# Altium PCB TM7705.PcbDoc
Units mm, origin at the board's own origin, x right, y up, seen from the top; angles counter-clockwise.
Board outline 80.01 x 33.4 mm, 2 copper layers (Top Layer, Bottom Layer); 36 components, 26 nets, 145 pads, 0 vias.
Unrouted connection lines stored in the file: 4.
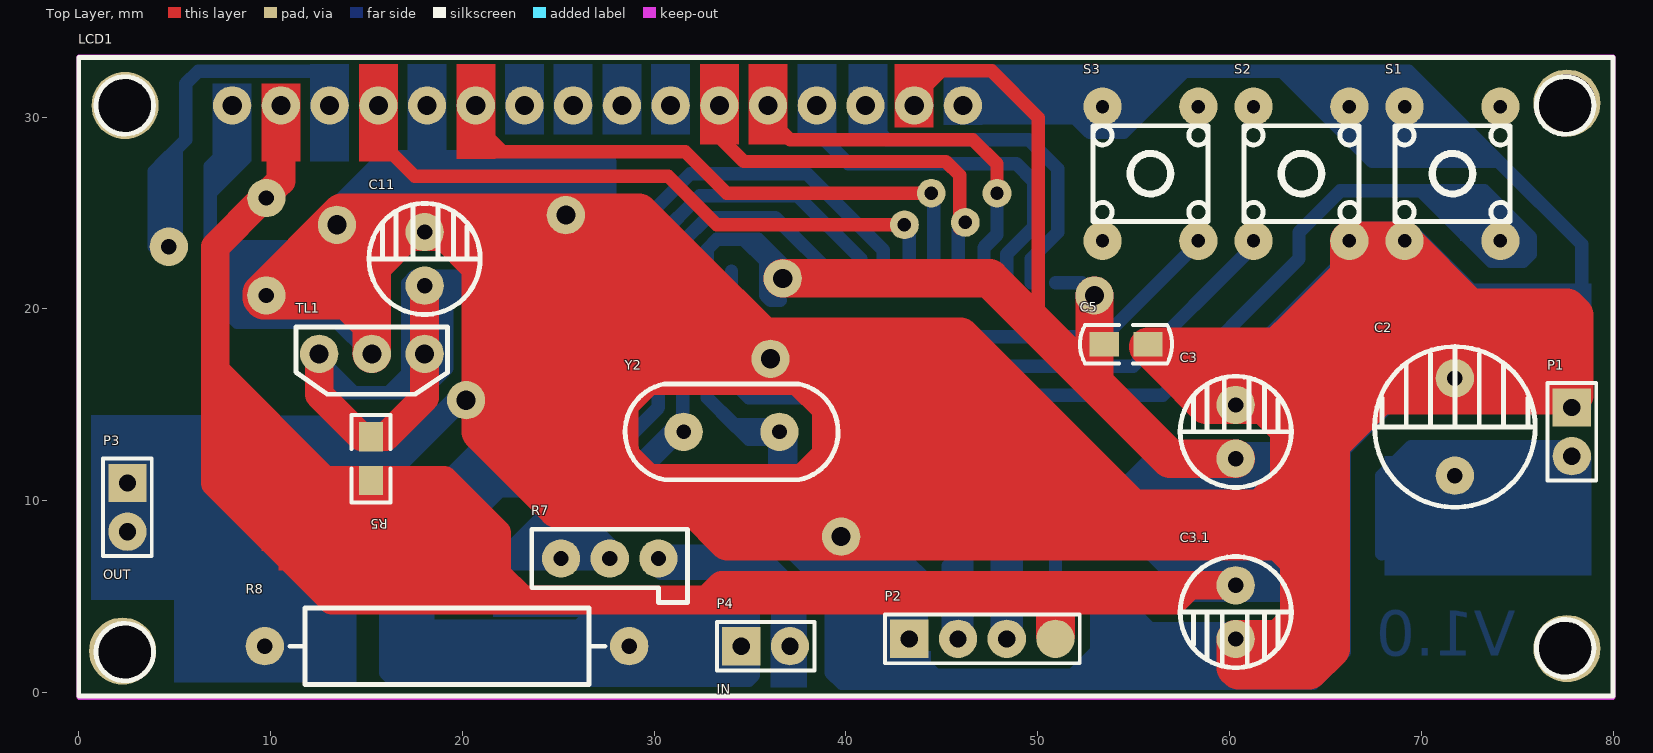
[diagram p0: Top Layer view]
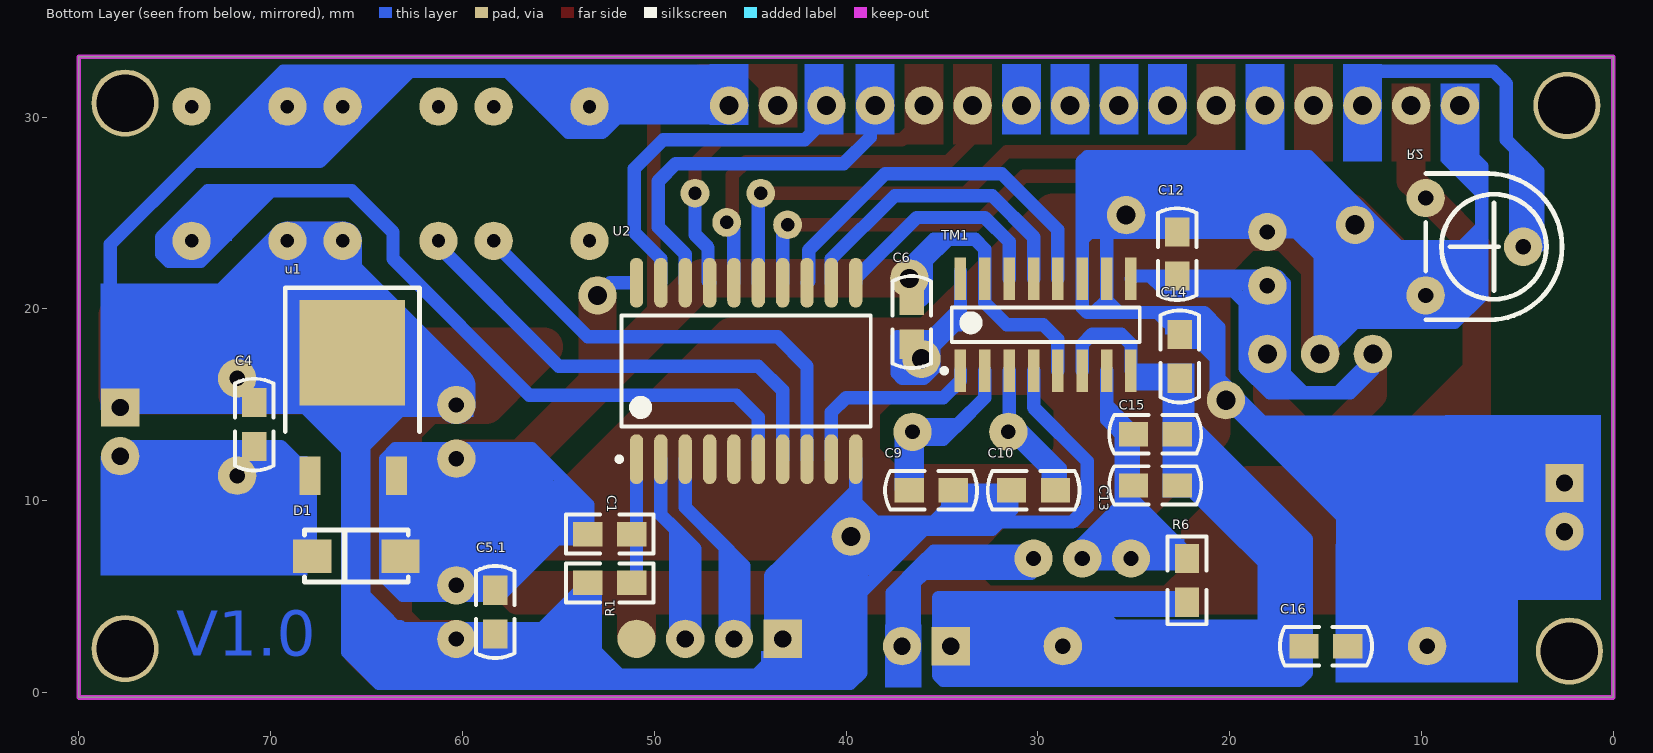
[diagram p1: Bottom Layer view, seen from below]

## Layer stack, top to bottom
Top Layer: signal copper 0.0356
Dielectric: dielectric 0.32, FR-4, Dk 4.8
Bottom Layer: signal copper 0.0356

## Board outline
0,-0.254 80.01,-0.254 80.01,33.147 0,33.147

## Design rules (kind name [scope] priority, off if disabled: settings)
Clearance [All] p1: gap=0.254
PolygonConnect [All] p1: connectstyle=Relief reliefconductorwidth=0.254 reliefentries=4 polygonreliefangle="90 Angle" airgapwidth=0.254
RoutingVias [All] p1: holewidth=0.711 width=1.27 viastyle="Through Hole" minholewidth=0.711 minwidth=1.27 maxholewidth=0.711 maxwidth=1.27
SolderMaskExpansion [All] p1: expansion=0.102
Width [All] p1: maxlimit=3 minlimit=0.4 preferedwidth=0.5 toplayer_minwidth=0.5 minimp=50.000000 maximp=50.000000 favimp=50.000000
28 further rules are at their usual default settings.

## Components (designator, comment, footprint, x,y, rotation, side; value= is the part's Value field where it differs from the comment)
C1 "10uF" 0805 53.467,8.255 r180 bottom
C2 "100uF" DR3 71.755,11.303 r90 top
C3 "100uF" DR 60.325,12.192 r90 top
C3.1 "100uF" DR 60.325,5.588 r270 top
C4 "104" 0805C 70.866,15.113 r270 bottom
C5 "104" 0805C 55.753,18.161 r180 top
C5.1 "104" 0805C 58.293,3.048 r90 bottom
C6 "226" 0805C 36.576,18.161 r90 bottom
C9 "30p" 0805C 34.417,10.541 r0 bottom
C10 "30p" 0805C 31.369,10.541 r180 bottom
C11 "47U" DR 18.034,21.209 r90 top
C12 "104" 0805C 22.733,24.003 r270 bottom
C13 "226" 0805C 22.733,10.795 r0 bottom
C14 "103" 0805C 22.606,18.669 r270 bottom
C15 "103" 0805C 22.733,13.462 r0 bottom
C16 "226" 0805C 16.129,2.413 r180 bottom
D1 "Diode" DO-214AC 65.532,7.112 r0 bottom
LCD1 "LCD1602" LCD1602 8.001,30.607 r0 top
P1 "Header 2" HDR1X2 77.851,14.859 r270 top
P2 "comm" HDR1X4 43.307,2.794 r0 top
P3 "OUT" HDR1X2 2.54,10.922 r270 top
P4 "IN" HDR1X2 34.544,2.413 r0 top
R1 "10K" 0805R 51.181,5.715 r0 bottom
R2 "10k" DWQ 9.779,20.701 r180 bottom
R5 "1K" 0805R 15.24,13.335 r270 top
R6 "5K" 0805R 22.225,4.699 r90 bottom
R7 "100k" DWQ1 30.226,6.985 r180 top
R8 "0.01" DZ-1W 28.702,2.413 r180 top
S1 "SW-PB" SW 71.628,27.051 r0 top
S2 "SW-PB" SW 63.754,27.051 r180 top
S3 "SW-PB" SW 55.88,27.051 r0 top
TL1 "TL431" TL431 18.034,17.653 r180 top
TM1 "TM7705" SOIC-16 29.591,19.177 r90 bottom
u1 "7805" DPAK 67.945,11.303 r180 bottom
U2 "STC12C2052" SOIC-20 45.212,16.764 r90 bottom
Y2 "4.9152M" JZ 34.036,13.589 r0 top

## Footprints (in the part's own frame and the unit in brackets; to place one, negate y for a bottom-side part, rotate by r counter-clockwise, add the part's x,y. Pads: shape width x height; smd on the part's side, far side on the other; paste and mask are expansions set on the pad)
0805 [mil]
  rect 60x50 smd: 1(0,0) 2(90,0)
  silkscreen extent -45,-40 135,40
0805C [mil]
  rect 60x50 smd: 1(0,0) 2(90,0)
  silkscreen extent -49,-39 140,39
0805R [mil]
  rect 60x50 smd: 1(0,0) 2(90,0)
  silkscreen extent -45,-40 135,40
DO-214AC [mm]
  rect 2x1.75 smd: 1(-2.3,0) 2(2.3,0)
  silkscreen extent -2.7,-1.35 2.7,1.35, body extent -2.74,-1.52 2.74,1.27, height 2.3
DPAK [mm]
  rect 1.1x2 smd: 1(0,0) 3(4.5,0)
  rect 5.5x5.5 smd: 2(2.2,6.4)
  silkscreen extent -1.3,2.3 5.7,9.8
DR [mm]
  round 2 hole 0.8: 1(0,0) 2(2.8,0)
  silkscreen extent -1.5,-2.9 4.3,2.9
DR3 [mm]
  round 2 hole 0.8: 1(0,0) 2(5.08,0)
  silkscreen extent -1.65,-4.19 6.73,4.19
DWQ [mm]
  round 2 hole 0.8: 1(0,0) 2(0,5.08) 3(5.08,2.54)
  silkscreen extent 0,-1.27 7.11,6.35
DWQ1 [mm]
  round 2 hole 0.8: 1(0,0) 2(5.08,0) 3(2.54,0)
  silkscreen extent -1.52,-1.52 6.6,2.29
DZ-1W [mm]
  round 2 hole 0.8: 1(0,0) 2(19,0)
  silkscreen extent 1.27,-2 17.7,2
HDR1X2 [mm] "Connector; Header; 2 Position"
  rect 2x2 hole 0.9: 1(0,0)
  round 2 hole 0.9: 2(2.54,0)
  silkscreen extent -1.27,-1.27 3.81,1.27
HDR1X4 [mm] "Connector; Header; 4 Position"
  rect 2x2 hole 0.9: 1(0,0)
  round 2 hole 0.9: 2(2.54,0) 3(5.08,0)
  round 2 all layers, no hole: 4(7.62,0)
  silkscreen extent -1.27,-1.27 8.89,1.27
JZ [mm]
  round 2 hole 0.762: 1(-2.5,0) 2(2.5,0)
  silkscreen extent -5.55,-2.5 5.56,2.5
LCD1602 [mm]
  round 2 hole 1: 1(0,0) 2(2.54,0) 3(5.08,0) 4(7.62,0) 5(10.16,0) 6(12.7,0) 7(15.24,0) 8(17.78,0) 9(20.32,0) 10(22.86,0) 11(25.4,0) 12(27.94,0) 13(30.48,0) 14(33.02,0) 15(35.56,0) 16(38.1,0)
  silkscreen extent -8,-30.8 72,2.5
SOIC-16 [mm]
  rect 2.2x0.6 smd: 1(-2.4,4.445) 2(-2.4,3.175) 3(-2.4,1.905) 4(-2.4,0.635) 5(-2.4,-0.635) 6(-2.4,-1.905) 7(-2.4,-3.175) 8(-2.4,-4.445) 9(2.4,-4.445) 10(2.4,-3.175) 11(2.4,-1.905) 12(2.4,-0.635) 13(2.4,0.635) 14(2.4,1.905) 15(2.4,3.175) 16(2.4,4.445)
  silkscreen extent -2.52,-4.9 0.9,5.42, body extent -3.1,-5 3,5, height 1.51
SOIC-20 [mm]
  oval 2.6x0.7 smd: 1(-4.6,5.715) 2(-4.6,4.445) 3(-4.6,3.175) 4(-4.6,1.905) 5(-4.6,0.635) 6(-4.6,-0.635) 7(-4.6,-1.905) 8(-4.6,-3.175) 9(-4.6,-4.445) 10(-4.6,-5.715) 11(4.6,-5.715) 12(4.6,-4.445) 13(4.6,-3.175) 14(4.6,-1.905) 15(4.6,-0.635) 16(4.6,0.635) 17(4.6,1.905) 18(4.6,3.175) 19(4.6,4.445) 20(4.6,5.715)
  silkscreen extent -4.72,-6.5 2.9,6.74, body extent -5.22,-6.47 5.33,6.53, height 2.56
SW [mm]
  round 2 hole 0.7: 1(-2.5,-3.5) 1(-2.5,3.5) 2(2.5,-3.5) 2(2.5,3.5)
  silkscreen extent -3,-2.5 3,2.5
TL431 [mm]
  round 2 hole 1: A(2.75,0) K(5.5,0) R(0,0)
  silkscreen extent -1.2,-1.4 6.7,2.1

## Part data
C1 C2 C3 C3.1 C11: library part "Cap Pol1", "Polarized Capacitor (Radial)"
C4 C5 C5.1 C6 C9 C10 C12 C13 C14 C15 C16: library part Cap, "Capacitor"
D1: "Default Diode"
P1: "Header, 2-Pin"
P2: library part "Header 4", "Header, 4-Pin"
P3 P4: library part "Header 2", "Header, 2-Pin"
R1 R5 R6 R8: library part Res2, "Resistor"
R2 R7: library part RPot, "Potentiometer"
S1 S2 S3: "Switch"
Y2: library part XTAL, "Crystal Oscillator"

## Free pads (board coordinates)
  round 3.5 hole 3: 2(2.413,30.607) 3(77.597,30.734) 4(77.597,2.286) 5(2.286,2.159)
  round 2 hole 1: 14(52.959,20.701) 15(36.703,21.59) 22(20.193,15.24) 23(39.751,8.128) 24(13.462,24.384) 25(25.4,24.892) 29(36.068,17.399)
  round 1.5 hole 0.7: 17(47.879,26.035) 18(46.228,24.511) 20(44.45,26.035) 21(43.053,24.384)

## Nets (pads, with @x,y where several pads share a name; then routed paths per layer and width w, separated by ;. In a path a pad name is that pad's centre, name@x,y a point inside that pad or via, vN(x,y) a via of type N, cw(c..) or ccw(c..) an arc to the next point about the centre after c; other vN are vias at no path point)
+5VCC: C1.1 C3.1 C3.1.1 C5.1.2 C5.2 C6.2 D1.1 LCD1.2 LCD1.15 P2.4 pad.14 pad.15 R2.2 R5.2 TM1.5 TM1.15 u1.3 U2.20 | length 308.4
  Top Layer w0.7: LCD1.15 43.561,30.988 44.989,32.416 ; 43.942,32.416 44.989,32.416 ; 50.8,18.161 50.038,18.923 50.038,29.972 47.594,32.416 44.989,32.416
  Top Layer w1.5: LCD1.2 10.541,26.67 9.525,25.654 7.112,23.241 7.112,16.764 ; 19.431,8.509 21.78,6.159 ; 21.082,6.985 17.018,11.049 ; C3.1.1 57.912,5.588 ; 7.112,13.97 11.303,9.779 16.51,9.779 ; 7.112,13.97 7.112,15.367 ; 7.112,13.97 7.112,10.922 13.208,4.826 21.463,4.826 ; 7.112,15.367 11.43,11.049 12.827,11.049 ; 7.112,15.367 7.112,16.764 ; 7.112,16.764 12.827,11.049 ; 12.827,11.049 R5.2 ; R5.2 16.51,9.779 ; R5.2 17.018,11.049 ; 16.51,9.779 21.463,4.826 ; 17.018,11.049 19.05,11.049 21.78,8.319 21.78,6.159 ; 21.463,4.826 23.114,4.826 ; 21.78,6.159 23.114,4.826 ; 23.114,4.826 32.766,4.826 ; 32.766,4.826 33.528,5.588 57.912,5.588 ; 32.766,4.826 57.15,4.826 57.912,5.588
  Top Layer w2: pad.15 47.498,21.59 52.959,16.129 ; pad.14 52.959,16.129 ; C3.1 56.896,12.192 52.959,16.129
  Bottom Layer w0.7: TM1.5 28.956,18.415 29.718,19.177 31.623,19.177 32.766,20.32 TM1.15 32.766,23.114 33.274,23.622 34.671,23.622 ; C6.2 36.068,20.447 35.814,20.701 35.814,22.479 34.671,23.622 ; pad.15 pad.15@36.703,21.844 ; U2.20 52.296,21.364 pad.14 ; C1.1@53.086,8.001 55.118,8.001 58.039,5.08 63.119,5.08 64.008,5.969 ; 57.277,11.938 57.277,11.684 57.658,11.303 u1.3@63.019,11.303 ; 57.531,7.112 59.817,7.112 u1.3@63.232,10.527 ; 58.42,6.096 62.216,6.096 D1.1 u1.3@63.232,10.527 ; 34.671,23.622 34.925,23.622 ; 34.925,23.622 pad.15@36.703,21.844 ; 34.925,23.622 35.433,23.622 36.703,22.352 pad.15@36.703,21.844 ; 61.622,12.7 63.5,12.7 64.008,12.192 64.008,5.969 ; 61.622,12.7 u1.3@63.019,11.303 ; 61.622,12.7 56.388,12.7 53.467,9.779 C1.1 55.626,8.255 57.912,5.969 64.008,5.969 ; u1.3@63.019,11.303 u1.3 63.445,10.74 u1.3@63.232,10.527 ; u1.3@63.019,11.303 63.232,11.09 u1.3@63.232,10.527
DIN: TM1.14 U2.11 | length 12
  Bottom Layer w0.7: TM1.14 31.496,23.495 32.766,24.765 36.322,24.765 39.497,21.59 U2.11
DOUT: TM1.13 U2.12 | length 16.2
  Bottom Layer w0.7: TM1.13 30.226,23.749 32.385,25.908 37.465,25.908 40.767,22.606 U2.12
DRDY: TM1.12 U2.13 | length 20.2
  Bottom Layer w0.7: TM1.12 28.956,24.13 31.877,27.051 37.973,27.051 41.957,23.067 41.957,21.444 U2.13
GND: C2.2 C3.1.2 C3.2 C4.1 C5.1 C5.1.1 C6.1 C9.1 C10.1 C11.2 C12.1 C14.1 C16.2 LCD1.1 LCD1.5 LCD1.16 P1.1 P2.1 P3.1 P3.2 pad.22 pad.23 pad.24 pad.25 pad.29 R1.2 R2.1 R8.2 S1.1 S2.1 S3.1 TL1.A TM1.4 TM1.10 TM1.11 TM1.16 u1.2 U2.10 | length 789.1
  Top Layer w2: TL1.A 15.284,19.177 ; 15.284,24.936 15.284,22.225 ; 24.32,12.573 25.59,11.303 ; 27.432,22.098 28.194,21.336 ; 40.386,12.319 39.243,12.319 ; 63.016,18.518 62.531,18.034 ; 15.284,19.177 14.014,20.447 9.652,20.447 9.525,20.574 9.525,20.828 13.716,25.019 22.86,25.019 ; 15.284,19.177 15.284,22.225 ; 15.284,22.225 17.068,24.009 C11.2 19.171,24.009 20.955,22.225 20.955,13.589 24.956,9.588 27.305,9.588 ; 22.86,25.019 25.59,22.288 25.59,11.303 ; 22.86,25.019 27.051,25.019 ; 25.59,11.303 27.305,9.588 ; 27.051,25.019 29.972,22.098 31.242,22.098 ; 27.051,25.019 29.21,25.019 32.131,22.098 ; 27.305,9.588 32.131,9.588 ; 28.194,15.113 28.194,21.336 ; 28.194,15.113 29.591,16.51 34.163,16.51 ; 28.194,15.113 28.194,12.319 29.591,10.922 37.846,10.922 ; 28.194,21.336 29.337,21.336 34.163,16.51 ; 31.242,22.098 35.242,18.098 ; 31.242,22.098 32.131,22.098 ; 32.131,9.588 33.846,7.874 53.975,7.874 ; 32.131,9.588 43.116,9.588 ; 32.131,22.098 35.687,18.542 45.974,18.542 54.927,9.588 ; 34.163,16.51 36.83,16.51 ; 35.242,18.098 35.623,18.479 37.592,16.51 ; 35.242,18.098 36.83,16.51 ; 36.83,16.51 37.592,16.51 ; 37.592,16.51 39.243,14.859 ; 37.846,10.922 39.243,12.319 ; 37.846,10.922 41.783,10.922 43.116,9.588 ; 39.243,12.319 39.243,14.859 ; 39.243,14.859 44.514,9.588 ; 43.116,9.588 44.514,9.588 ; 44.514,9.588 54.927,9.588 ; 53.975,7.874 55.689,9.588 ; 53.975,7.874 62.611,7.874 ; 54.927,9.588 55.689,9.588 ; 55.689,9.588 61.658,9.588 ; 56.896,16.891 59.262,16.891 C3.2@60.325,15.828 ; 56.896,16.891 55.753,18.034 62.531,18.034 ; 56.896,16.891 58.795,14.992 C3.2 ; C3.2 C3.2@60.325,15.828 ; C3.2 61.843,14.992 ; C3.2@60.325,15.828 62.531,18.034 ; 61.658,9.588 63.119,11.049 63.119,13.716 61.843,14.992 ; 61.658,9.588 65.278,9.588 ; 61.843,14.992 62.859,14.992 65.278,12.573 ; 62.531,18.034 66.254,21.757 66.254,23.551 69.032,23.551 72.517,20.066 77.597,20.066 77.978,19.685 77.978,15.494 67.818,15.494 65.278,12.954 65.278,12.573 ; 62.605,2.788 C3.1.2 60.325,1.286 60.468,1.143 64.135,1.143 65.278,2.286 65.278,4.826 ; 62.605,2.788 63.627,3.81 63.627,6.858 62.611,7.874 ; 62.605,2.788 63.24,2.788 65.278,4.826 ; 62.611,7.874 65.151,7.874 65.278,8.001 ; 65.278,4.826 65.278,8.001 ; 65.278,8.001 65.278,9.588 ; 65.278,9.588 65.278,12.573
  Bottom Layer w0.7: 6.604,14.097 9.779,14.097 ; 7.239,27.051 8.128,27.94 8.636,27.94 8.636,27.813 6.858,26.035 ; LCD1.1 8.001,28.575 6.858,27.432 6.858,26.035 ; 14.097,4.064 14.097,9.144 ; TL1.A@15.494,17.653 TL1.A ; 18.161,13.97 18.288,14.097 ; 18.161,27.432 18.161,27.94 ; LCD1.5 18.161,27.94 ; TM1.4 30.226,14.859 27.432,12.065 27.432,9.652 28.194,8.89 32.385,8.89 ; 34.036,20.447 34.036,20.066 ; TM1.16@34.036,21.971 TM1.16 34.036,20.066 ; 34.798,9.525 35.433,8.89 ; 35.56,8.89 35.433,8.89 ; pad.29@36.703,17.399 pad.29 pad.29@35.433,18.034 ; C6.1@36.83,18.542 35.56,18.542 34.036,20.066 ; 37.338,18.542 37.338,16.637 37.084,16.383 35.941,16.383 35.433,16.891 pad.29@35.433,18.034 ; 38.1,8.509 35.941,8.509 ; U2.10 39.497,10.541 ; P2.1 43.307,6.731 ; LCD1.16@45.593,29.972 51.943,29.972 ; LCD1.16 51.308,30.607 ; LCD1.16@46.609,31.242 47.879,31.242 49.022,32.385 ; 46.609,32.385 49.022,32.385 ; 55.816,3.365 R1.2 53.086,5.334 53.086,2.159 51.816,0.889 44.673,0.889 43.942,1.62 43.942,6.096 43.307,6.731 ; 63.246,3.429 63.5,3.429 64.135,4.064 ; 63.627,3.429 64.135,3.937 64.135,4.064 ; S2.1@65.745,23.042 S2.1@66.254,23.551 ; u1.2@66.254,18.212 69.128,21.086 S1.1@69.128,23.551 ; S2.1@66.254,30.551 66.254,32.218 ; S1.1@69.001,30.424 69.001,31.456 68.072,32.385 ; S1.1@69.128,30.551 69.652,30.551 72.517,27.686 ; P1.1 68.199,14.859 ; 78.359,20.447 78.359,23.368 74.041,27.686 ; 6.858,21.844 6.858,20.701 8.255,19.304 13.462,19.304 15.113,17.653 TL1.A ; 6.858,21.844 7.683,22.669 ; 6.858,21.844 6.858,23.495 ; 6.858,23.495 6.858,24.257 ; 6.858,23.495 7.683,22.669 ; 6.858,24.257 6.858,26.035 ; 6.858,24.257 7.874,23.241 8.255,23.241 ; 7.683,22.669 8.255,23.241 ; 8.255,23.241 11.176,23.241 15.875,27.94 18.161,27.94 ; 9.779,14.097 14.097,9.779 14.097,9.144 ; 9.779,14.097 18.288,14.097 ; 14.097,9.144 20.701,15.748 20.701,17.399 21.971,18.669 C14.1 23.749,19.812 ; TL1.A 15.284,19.431 15.284,22.777 16.516,24.009 C11.2 18.04,24.003 C12.1 26.289,24.003 ; 18.161,27.94 27.432,27.94 27.686,27.686 27.686,23.622 ; 18.288,14.097 20.574,16.383 20.574,19.05 21.336,19.812 23.749,19.812 ; 23.749,19.812 25.781,19.812 ; 25.781,19.812 26.416,20.447 ; 25.781,19.812 27.051,19.812 ; 26.289,24.003 27.305,24.003 27.686,23.622 ; 26.289,24.003 26.416,23.876 TM1.10 26.416,20.447 ; 26.416,20.447 27.051,19.812 ; 27.051,19.812 27.432,19.812 27.686,20.066 TM1.11 27.686,23.622 ; 34.036,20.066 34.036,19.177 34.29,19.177 pad.29@35.433,18.034 ; 34.925,8.89 34.417,9.398 C9.1 C10.1 31.369,9.525 32.385,8.509 35.306,8.509 ; 34.925,8.89 35.306,8.509 ; 34.925,8.89 35.433,8.89 ; 35.306,8.509 35.941,8.509 ; 35.433,8.89 36.322,8.89 ; 35.941,8.509 39.243,5.207 39.243,1.016 39.782,0.477 64.358,0.477 65.977,2.095 65.977,12.636 ; 35.941,8.509 36.322,8.89 ; 36.322,8.89 38.481,8.89 39.497,9.906 39.497,10.541 ; 39.497,10.541 43.307,6.731 ; 49.022,32.385 54.864,32.385 ; 51.308,30.607 53.324,30.607 53.38,30.551 53.38,30.901 54.864,32.385 ; 51.308,30.607 51.943,29.972 ; 51.943,29.972 52.705,29.21 54.483,29.21 57.658,32.385 ; 54.864,32.385 57.658,32.385 ; 57.658,32.385 62.738,32.385 ; 62.738,32.385 68.072,32.385 ; 62.738,32.385 67.437,27.686 72.517,27.686 ; 64.135,4.064 65.151,5.08 65.151,11.811 ; 65.151,11.811 65.405,12.065 ; 65.151,11.811 65.151,12.827 ; 65.151,12.827 65.151,14.859 ; 65.151,12.827 63.119,14.859 65.151,14.859 ; 65.151,12.827 65.405,12.573 65.405,12.065 ; 65.151,14.859 68.199,14.859 ; 65.405,12.065 65.977,12.636 ; 65.977,12.636 68.199,14.859 ; 68.072,32.385 69.342,32.385 74.041,27.686 ; 72.517,27.686 74.041,27.686
  Bottom Layer w2: 61.722,16.764 64.806,16.764 63.536,15.494 60.827,15.494 C3.2 60.325,16.002 66.254,21.931 66.254,23.551 69.128,23.551 72.486,20.193 73.279,20.193
I: C13.1 C14.2 C15.1 C16.1 P4.1 R6.1 R8.1 TM1.6 TM1.8 | length 91.4
  Bottom Layer w0.7: C16.1 16.129,4.699 22.225,10.795 C13.1 C15.1 C14.2@22.733,16.002 ; C16.1@16.764,2.159 24.765,2.159 27.559,4.953 ; R6.1@22.479,4.953 27.559,4.953 ; TM1.6 27.686,18.161 27.178,18.669 25.654,18.669 25.146,18.161 TM1.8 24.752,16.383 C14.2 22.352,16.129 22.225,16.129 22.225,14.224 16.002,8.001 16.002,1.016 16.383,0.635 34.925,0.635 35.179,0.889 35.179,4.953 27.559,4.953
LOAD_V: P4.2 R7.1 | length 30.3
  Bottom Layer w0.7: R7.1 30.607,7.366 35.433,7.366 36.068,6.731 ; R7.1@30.353,6.223 35.941,6.223 ; R7.1@30.48,6.731 35.433,6.731 ; P4.2@36.449,2.794 36.449,5.715 ; P4.2@36.957,2.159 36.957,5.207 36.449,5.715 ; P4.2@37.592,2.667 37.592,5.207 36.068,6.731 ; 35.433,6.731 36.068,6.731 ; 35.433,6.731 35.941,6.223 ; 35.941,6.223 36.449,5.715
NetC1_2: C1.2 R1.1 U2.1 | length 6.6
  Bottom Layer w0.7: U2.1 50.927,5.969 R1.1
NetC9_2: C9.2 TM1.2 Y2.2 | length 12.8
  Bottom Layer w0.7: TM1.2 32.766,15.367 34.163,13.97 ; Y2.2@36.155,13.208 34.925,13.208 34.544,13.589 ; Y2.2@36.155,13.97 34.163,13.97 ; C9.2@36.449,10.541 C9.2 Y2.2@36.703,13.422 ; Y2.2 34.544,13.589 ; 34.163,13.97 34.544,13.589
NetC10_2: C10.2 TM1.3 Y2.1 | length 13
  Bottom Layer w0.7: C10.2@28.829,10.414 28.829,11.684 Y2.1@31.496,14.351 ; C10.2@28.996,10.628 C10.2 29.464,10.922 29.464,11.557 31.496,13.589 Y2.1 ; Y2.1@31.496,13.676 Y2.1@31.496,14.351 ; 31.496,14.986 Y2.1@31.496,14.351 ; TM1.3 Y2.1@31.496,14.351
NetC11_1: C11.1 C12.2 R5.1 TL1.K TL1.R TM1.9 | length 54.3
  Top Layer w1.5: TL1.K 12.534,15.533 14.732,13.335 R5.1 16.002,13.335 18.034,15.367 TL1.R C11.1
  Bottom Layer w0.7: TL1.K TL1.K@12.534,17.438 ; TL1.R 18.034,16.764 16.891,15.621 ; C11.1 C11.1@18.542,21.717 ; 18.415,16.637 17.399,15.621 ; TM1.9 25.006,21.717 24.13,21.717 ; TL1.K@12.534,17.438 12.534,16.803 13.716,15.621 14.351,15.621 ; TL1.K@12.534,17.438 14.351,15.621 ; 14.351,15.621 16.129,15.621 ; 16.129,15.621 17.145,16.637 17.145,21.336 17.526,21.717 C11.1@18.542,21.717 ; 16.129,15.621 16.891,15.621 ; 16.891,15.621 17.399,15.621 ; 17.399,15.621 17.907,15.621 19.177,16.891 19.177,20.32 19.812,20.955 23.495,20.955 23.495,21.082 24.13,21.717 ; C11.1@18.542,21.717 C12.2 24.13,21.717
NetLCD1_3: LCD1.3 R2.3 | length 31.3
  Bottom Layer w0.7: R2.3@3.937,23.241 3.937,27.178 4.445,27.686 ; R2.3@4.445,23.114 4.445,27.686 ; R2.3@5.08,23.749 5.08,28.003 ; LCD1.3 13.081,31.623 12.319,32.385 ; 4.445,27.686 5.08,28.321 ; 4.445,27.686 4.445,27.559 4.889,28.003 5.08,28.003 ; 5.08,28.003 5.08,28.321 ; 5.08,28.321 5.588,28.829 5.588,31.75 6.223,32.385 12.319,32.385 ; 12.319,32.385 13.081,32.385 ; 13.081,32.385 13.335,32.385 13.716,32.004 13.716,31.623 13.081,32.258 13.081,32.385
NetLCD1_4: LCD1.4 pad.21 U2.14 | length 33.8
  Top Layer w0.7: LCD1.4 15.621,28.829 17.526,26.924 30.734,26.924 33.274,24.384 pad.21
  Bottom Layer w0.7: U2.14 pad.21@43.307,24.13
NetLCD1_6: LCD1.6 pad.20 U2.15 | length 31.9
  Top Layer w0.7: LCD1.6 20.701,29.591 22.098,28.194 ; 20.955,28.194 22.098,28.194 ; pad.20 33.782,26.035 31.623,28.194 22.098,28.194
  Bottom Layer w0.7: U2.15 pad.20@44.577,25.908
NetLCD1_11: LCD1.11 pad.18 U2.16 | length 20.9
  Top Layer w0.7: LCD1.11 33.401,28.956 34.671,27.686 45.212,27.686 45.931,26.967 45.931,24.214 pad.18
  Bottom Layer w0.7: U2.16 pad.18@45.847,24.13
NetLCD1_12: LCD1.12 pad.17 U2.17 | length 20.1
  Top Layer w0.7: LCD1.12 35.941,29.972 37.084,28.829 46.609,28.829 47.879,27.559 pad.17
  Bottom Layer w0.7: U2.17 47.201,21.448 47.201,23.198 47.879,23.876 pad.17
NetLCD1_13: LCD1.13 U2.18 | length 19.5
  Bottom Layer w0.7: LCD1.13@38.735,30.607 38.735,28.956 40.132,27.559 48.895,27.559 49.784,26.67 49.784,24.257 48.387,22.86 U2.18
NetLCD1_14: LCD1.14 U2.19 | length 18.3
  Bottom Layer w0.7: LCD1.14 41.021,29.972 42.164,28.829 49.53,28.829 51.054,27.305 51.054,24.003 49.657,22.606 U2.19
NetS1_2: S1.2 U2.6 | length 53.7
  Bottom Layer w0.7: U2.6 44.577,14.351 45.72,15.494 56.515,15.494 63.627,22.606 63.627,24.003 65.786,26.162 69.977,26.162 ; 73.66,25.273 72.898,26.035 72.898,26.162 ; 73.914,25.019 74.128,24.805 S1.2@74.128,24.297 ; S1.2@74.128,23.551 S1.2@74.128,24.297 ; 69.977,26.162 72.263,26.162 ; 69.977,26.162 73.66,22.479 75.311,22.479 75.692,22.86 75.692,23.749 73.279,26.162 72.898,26.162 ; 72.263,26.162 S1.2@74.128,24.297 ; 72.263,26.162 72.898,26.162
NetS2_2: S2.2 U2.7 | length 24.7
  Bottom Layer w0.7: U2.7 43.307,15.748 44.577,17.018 54.991,17.018 S2.2@61.254,23.281
NetS3_2: S3.2 U2.8 | length 23.9
  Bottom Layer w0.7: U2.8 42.037,17.018 43.561,18.542 53.467,18.542 S3.2@58.38,23.455
POWER: C2.1 C4.2 D1.2 P1.2 u1.1 | length 14.8
  Bottom Layer w0.7: D1.2@67.945,7.225 u1.1 69.469,12.827 77.343,12.827 P1.2
RXD: P2.3 U2.2 | length 20.7
  Bottom Layer w0.7: P2.3@48.895,3.302 48.895,8.509 ; U2.2 49.657,9.271 48.895,8.509 ; 48.387,8.001 P2.3 47.879,3.302 47.879,7.493 48.387,8.001 ; 48.387,8.001 48.895,8.509
SCLK: TM1.1 U2.9 | length 10.4
  Bottom Layer w0.7: TM1.1 34.036,16.256 34.925,15.367 40.005,15.367 40.767,14.605 U2.9
TXD: P2.2 U2.3 | length 20.1
  Bottom Layer w0.7: U2.3 48.387,9.652 46.291,7.556 ; P2.2 45.847,7.112 ; P2.2 46.291,3.238 46.291,7.556 ; P2.2 45.339,3.302 45.339,6.604 45.847,7.112 ; 45.847,7.112 46.291,7.556
V: C13.2 C15.2 R6.2 R7.2 R7.3 TM1.7 | length 30.6
  Bottom Layer w0.7: R6.2@22.098,7.112 25.019,10.033 ; C15.2@25.273,13.081 26.416,14.224 ; TM1.7 26.416,14.986 ; 25.019,10.033 C13.2 C15.2 25.019,13.589 26.416,14.986 ; 25.019,10.033 25.019,8.89 23.114,6.985 R7.2 R7.3 27.686,7.747 25.654,9.779 25.654,13.462 26.416,14.224 ; 26.416,14.224 26.416,14.986
pads on no net: LCD1.7 LCD1.8 LCD1.9 LCD1.10 U2.4 U2.5

## Keep-outs
Keep-Out Layer:
  the board outline again, w0.254

## Other copper
Top Layer:
  rectangle net +5VCC: 49.911,2.794 51.943,4.318
  rectangle net GND: 20.193,13.462 25.59,24.511
  rectangle net GND: 21.971,12.446 28.067,21.844
  rectangle net GND: 26.162,10.414 29.21,12.827
  rectangle net GND: 11.43,21.082 14.478,24.13
  rectangle net GND: 62.865,10.16 65.151,13.335
  rectangle net GND: 63.5,13.716 66.675,16.51
  rectangle net GND: 61.214,15.494 78.105,18.034
  rectangle net GND: 63.246,17.78 77.724,19.431
  rectangle net GND: 64.897,19.177 72.136,20.955
  rectangle net GND: 66.294,20.574 70.612,22.987
  rectangle net GND: 28.321,16.764 33.02,20.701
  rectangle net NetLCD1_4: 14.605,27.686 16.637,32.766
  rectangle net NetLCD1_6: 19.685,27.813 21.717,32.766
  rectangle net NetLCD1_11: 32.385,28.575 34.417,32.766
  rectangle net NetLCD1_12: 34.925,28.575 36.957,32.766
  rectangle net +5VCC: 42.545,29.464 44.577,32.766
  rectangle net +5VCC: 9.525,27.686 11.557,31.75
  rectangle net GND: 25.019,21.844 28.067,24.511
  rectangle net GND: 41.021,10.033 46.101,17.78
  rectangle net GND: 37.846,15.621 41.402,17.78
  rectangle net GND: 39.497,13.589 41.783,15.875
  rectangle net GND: 45.847,10.414 50.419,14.732
  rectangle net GND: 50.165,10.287 53.34,12.192
  rectangle net GND: 50.038,11.811 51.562,12.954
  rectangle net GND: 45.847,14.478 49.276,16.002
  rectangle net GND: 45.72,15.621 47.752,17.526
  rectangle net +5VCC: 12.319,5.08 20.066,9.398
  rectangle net +5VCC: 10.414,6.35 12.573,9.525
  rectangle net +5VCC: 7.239,10.668 10.16,12.7
  rectangle net +5VCC: 8.128,9.017 10.541,10.922
  rectangle net +5VCC: 9.525,7.366 11.557,9.271
Bottom Layer:
  rectangle net POWER: 69.342,12.065 77.724,12.7
  rectangle net GND: 32.131,8.636 34.798,9.271
  rectangle net GND: 31.496,9.144 35.052,10.287
  rectangle net GND: 15.748,23.876 27.686,27.94
  rectangle net GND: 8.128,19.431 15.284,23.114
  rectangle net GND: 6.858,20.193 8.382,22.225
  rectangle net GND: 7.493,21.971 8.509,22.86
  rectangle net GND: 7.62,19.431 8.636,20.32
  rectangle net GND: 14.351,18.161 15.113,19.558
  rectangle net GND: 13.716,18.669 14.732,19.558
  rectangle net GND: 11.303,22.987 15.748,23.622
  rectangle net GND: 13.462,23.393 15.9,25.781
  rectangle net GND: 15.24,25.4 16.002,27.432
  rectangle net GND: 14.478,25.527 15.367,26.797
  rectangle net GND: 13.97,25.527 14.478,26.162
  rectangle net GND: 12.7,23.495 13.716,25.146
  rectangle net GND: 11.938,23.495 12.7,24.384
  rectangle net NetC11_1: 17.335,16.51 19.304,21.526
  rectangle net NetC11_1: 18.542,20.955 22.86,21.717
  rectangle net GND: 4.953,0.508 14.478,7.747
  rectangle net I: 27.559,0.508 35.306,5.207
  rectangle net GND: 0.635,4.826 8.763,14.478
  rectangle net GND: 8.509,7.112 13.843,9.906
  rectangle net GND: 8.509,9.906 11.684,12.192
  rectangle net GND: 8.509,12.065 10.287,13.843
  rectangle net GND: 10.16,11.938 11.303,13.081
  rectangle net GND: 11.557,9.779 12.446,11.811
  rectangle net GND: 12.446,9.779 13.716,10.541
  rectangle net GND: 12.192,10.414 13.208,11.049
  rectangle net GND: 10.287,9.779 14.605,14.097
  rectangle net GND: 14.351,11.557 16.764,13.97
  rectangle net GND: 16.51,12.954 18.161,13.97
  rectangle net GND: 16.51,12.192 17.526,12.954
  rectangle net GND: 14.605,10.033 15.494,11.557
  rectangle net GND: 15.24,10.795 16.129,11.684
  rectangle net GND: 20.701,17.907 23.114,19.177
  rectangle net GND: 20.955,18.669 23.368,19.685
  rectangle net I: 22.987,15.748 25.273,17.145
  rectangle net I: 21.844,12.573 23.495,17.145
  rectangle net I: 16.002,2.159 18.542,8.001
  rectangle net I: 16.256,5.969 18.542,8.509
  rectangle net I: 16.764,7.747 19.558,9.017
  rectangle net I: 19.304,9.652 21.082,11.43
  rectangle net I: 21.463,10.16 23.495,13.462
  rectangle net I: 20.193,10.16 22.098,12.446
  rectangle net I: 20.955,12.065 21.717,13.081
  rectangle net I: 19.685,10.795 20.574,11.811
  rectangle net I: 18.288,8.763 20.701,10.668
  rectangle net I: 17.526,8.509 18.923,9.906
  rectangle net I: 17.145,8.763 18.034,9.271
  rectangle net I: 19.113,10.033 20.066,11.112
  rectangle net V: 22.352,6.35 27.559,8.001
  rectangle net V: 23.241,8.001 27.178,8.509
  rectangle net V: 23.495,8.382 26.924,8.763
  rectangle net V: 24.003,8.636 26.416,9.271
  rectangle net V: 24.511,8.89 26.162,9.779
  rectangle net I: 26.797,0.889 27.813,4.445
  rectangle net I: 26.035,0.889 26.797,3.81
  rectangle net I: 25.4,1.778 26.162,3.175
  rectangle net I: 16.002,0.762 26.67,2.286
  rectangle net I: 16.129,2.413 17.907,4.572
  rectangle net I: 19.304,8.382 19.812,9.017
  rectangle net I: 18.415,7.366 18.796,8.001
  rectangle net I: 21.59,3.937 26.924,4.826
  rectangle net +5VCC: 57.468,11.493 63.627,12.573
  rectangle net +5VCC: 63.232,7.112 63.881,10.527
  rectangle net +5VCC: 58.039,6.223 63.119,7.112
  rectangle net +5VCC: 60.452,6.731 63.373,8.001
  rectangle net +5VCC: 61.087,7.493 63.881,8.89
  rectangle net +5VCC: 61.849,8.636 63.627,9.525
  rectangle net +5VCC: 62.484,9.271 63.246,10.033
  rectangle net GND: 41.052,0.477 43.307,6.731
  rectangle net GND: 42.926,0.477 44.45,2.159
  rectangle net GND: 39.243,2.286 43.053,7.239
  rectangle net GND: 39.624,1.524 41.275,2.54
  rectangle net GND: 40.386,0.762 41.529,1.651
  rectangle net GND: 38.1,6.096 41.402,8.763
  rectangle net GND: 41.148,6.985 42.164,8.255
  rectangle net GND: 41.91,6.985 42.418,7.62
  rectangle net GND: 38.862,5.461 39.624,6.223
  rectangle net GND: 36.703,7.366 38.354,8.255
  rectangle net GND: 37.465,6.731 38.354,7.493
  rectangle net GND: 39.116,8.382 40.386,9.906
  rectangle net GND: 40.259,8.509 40.894,9.144
  rectangle net GND: 38.798,8.509 39.497,9.207
  rectangle net GND: 52.832,0.762 64.77,3.683
  rectangle net GND: 52.197,0.508 53.213,1.397
  rectangle net GND: 53.213,3.937 54.356,5.207
  rectangle net GND: 54.229,3.683 54.864,4.445
  rectangle net GND: 64.516,1.27 65.659,2.413
  rectangle net GND: 64.389,2.286 65.977,4.318
  rectangle net GND: 64.643,4.064 65.977,4.826
  rectangle net GND: 65.024,4.699 66.294,14.605
  rectangle net GND: 66.294,13.081 66.802,14.605
  rectangle net GND: 66.802,13.843 67.437,14.605
  rectangle net GND: 63.881,13.716 64.897,14.605
  rectangle net GND: 64.643,13.462 64.897,13.716
  rectangle net POWER: 68.072,6.096 78.867,12.319
  rectangle net GND: 66.167,14.732 78.867,21.336
  rectangle net GND: 66.294,20.574 70.358,22.733
  rectangle net GND: 59.436,14.351 64.389,15.875
  rectangle net +5VCC: 57.531,5.08 63.119,7.112
  rectangle net I: 18.034,2.032 26.416,3.81
  rectangle net GND: 53.213,3.556 55.372,4.191
  rectangle net +5VCC: 56.388,7.112 63.119,12.446
  rectangle net +5VCC: 53.594,7.874 56.769,9.906
  rectangle net +5VCC: 53.848,9.652 56.642,10.414
  rectangle net +5VCC: 54.356,10.414 56.642,11.049
  rectangle net +5VCC: 55.245,11.049 56.642,11.811
  rectangle net +5VCC: 55.753,11.557 57.023,12.319
  rectangle net GND: 36.576,16.637 37.338,17.145
  rectangle: 22.225,29.083 24.257,32.766
  rectangle: 24.765,29.083 26.797,32.766
  rectangle: 27.305,29.083 29.337,32.766
  rectangle: 29.845,29.083 31.877,32.766
  rectangle net NetLCD1_13: 37.465,29.083 39.497,32.766
  rectangle net NetLCD1_14: 40.132,29.083 42.164,32.766
  rectangle net GND: 45.085,29.591 47.117,32.766
  rectangle net NetLCD1_3: 12.065,27.686 14.097,32.766
  rectangle net GND: 6.985,27.686 9.017,31.75
  rectangle net GND: 17.145,27.94 19.177,32.766
  rectangle net GND: 67.056,27.686 73.279,28.956
  rectangle net GND: 66.548,28.448 69.596,32.258
  rectangle net GND: 69.469,28.829 72.39,29.591
  rectangle net GND: 69.469,29.337 72.009,30.099
  rectangle net GND: 69.215,29.972 71.374,30.607
  rectangle net GND: 69.342,30.48 70.358,31.75
  rectangle net GND: 70.104,30.48 70.866,30.988
  rectangle net GND: 63.5,31.242 66.294,32.131
  rectangle net GND: 64.262,30.607 66.802,31.242
  rectangle net GND: 64.897,29.972 66.421,30.734
  rectangle net GND: 66.04,28.702 67.183,29.845
  rectangle net GND: 46.609,29.845 55.118,32.385
  rectangle net GND: 52.451,29.337 54.737,29.972
  rectangle net GND: 54.991,30.226 56.007,32.131
  rectangle net GND: 55.753,30.988 56.642,32.131
  rectangle net GND: 56.642,31.496 57.023,32.131
  rectangle net LOAD_V: 36.068,0.254 37.973,3.556
  rectangle net NetC9_2: 35.941,10.541 37.465,13.462
  rectangle net NetS1_2: 73.025,22.669 75.501,24.257
  rectangle net NetS1_2: 70.739,25.146 72.517,26.035
  rectangle net NetS1_2: 71.374,24.511 73.66,25.273
  rectangle net NetS1_2: 72.009,23.551 74.128,24.638
  rectangle net NetS1_2: 72.136,24.638 74.128,25.654
  rectangle net GND: 39.243,0.889 40.767,2.413
  rectangle net GND: 39.624,0.508 40.767,1.016
  text "V1.0" at 74.93,1.143 h4